# Altium PCB PCB_Control.V03.R00.PcbDoc (part 5 of 7)
Units mm, origin at the board's own origin, x right, y up, seen from the top; angles counter-clockwise.
Board outline 188 x 90 mm, 6 copper layers (Top Layer, GND 1, PWR, Signal L4, GND 2, Bottom Layer), stack 1.548 mm thick; 541 components, 265 nets, 1491 pads, 2159 vias.
Unrouted connection lines stored in the file: 819.
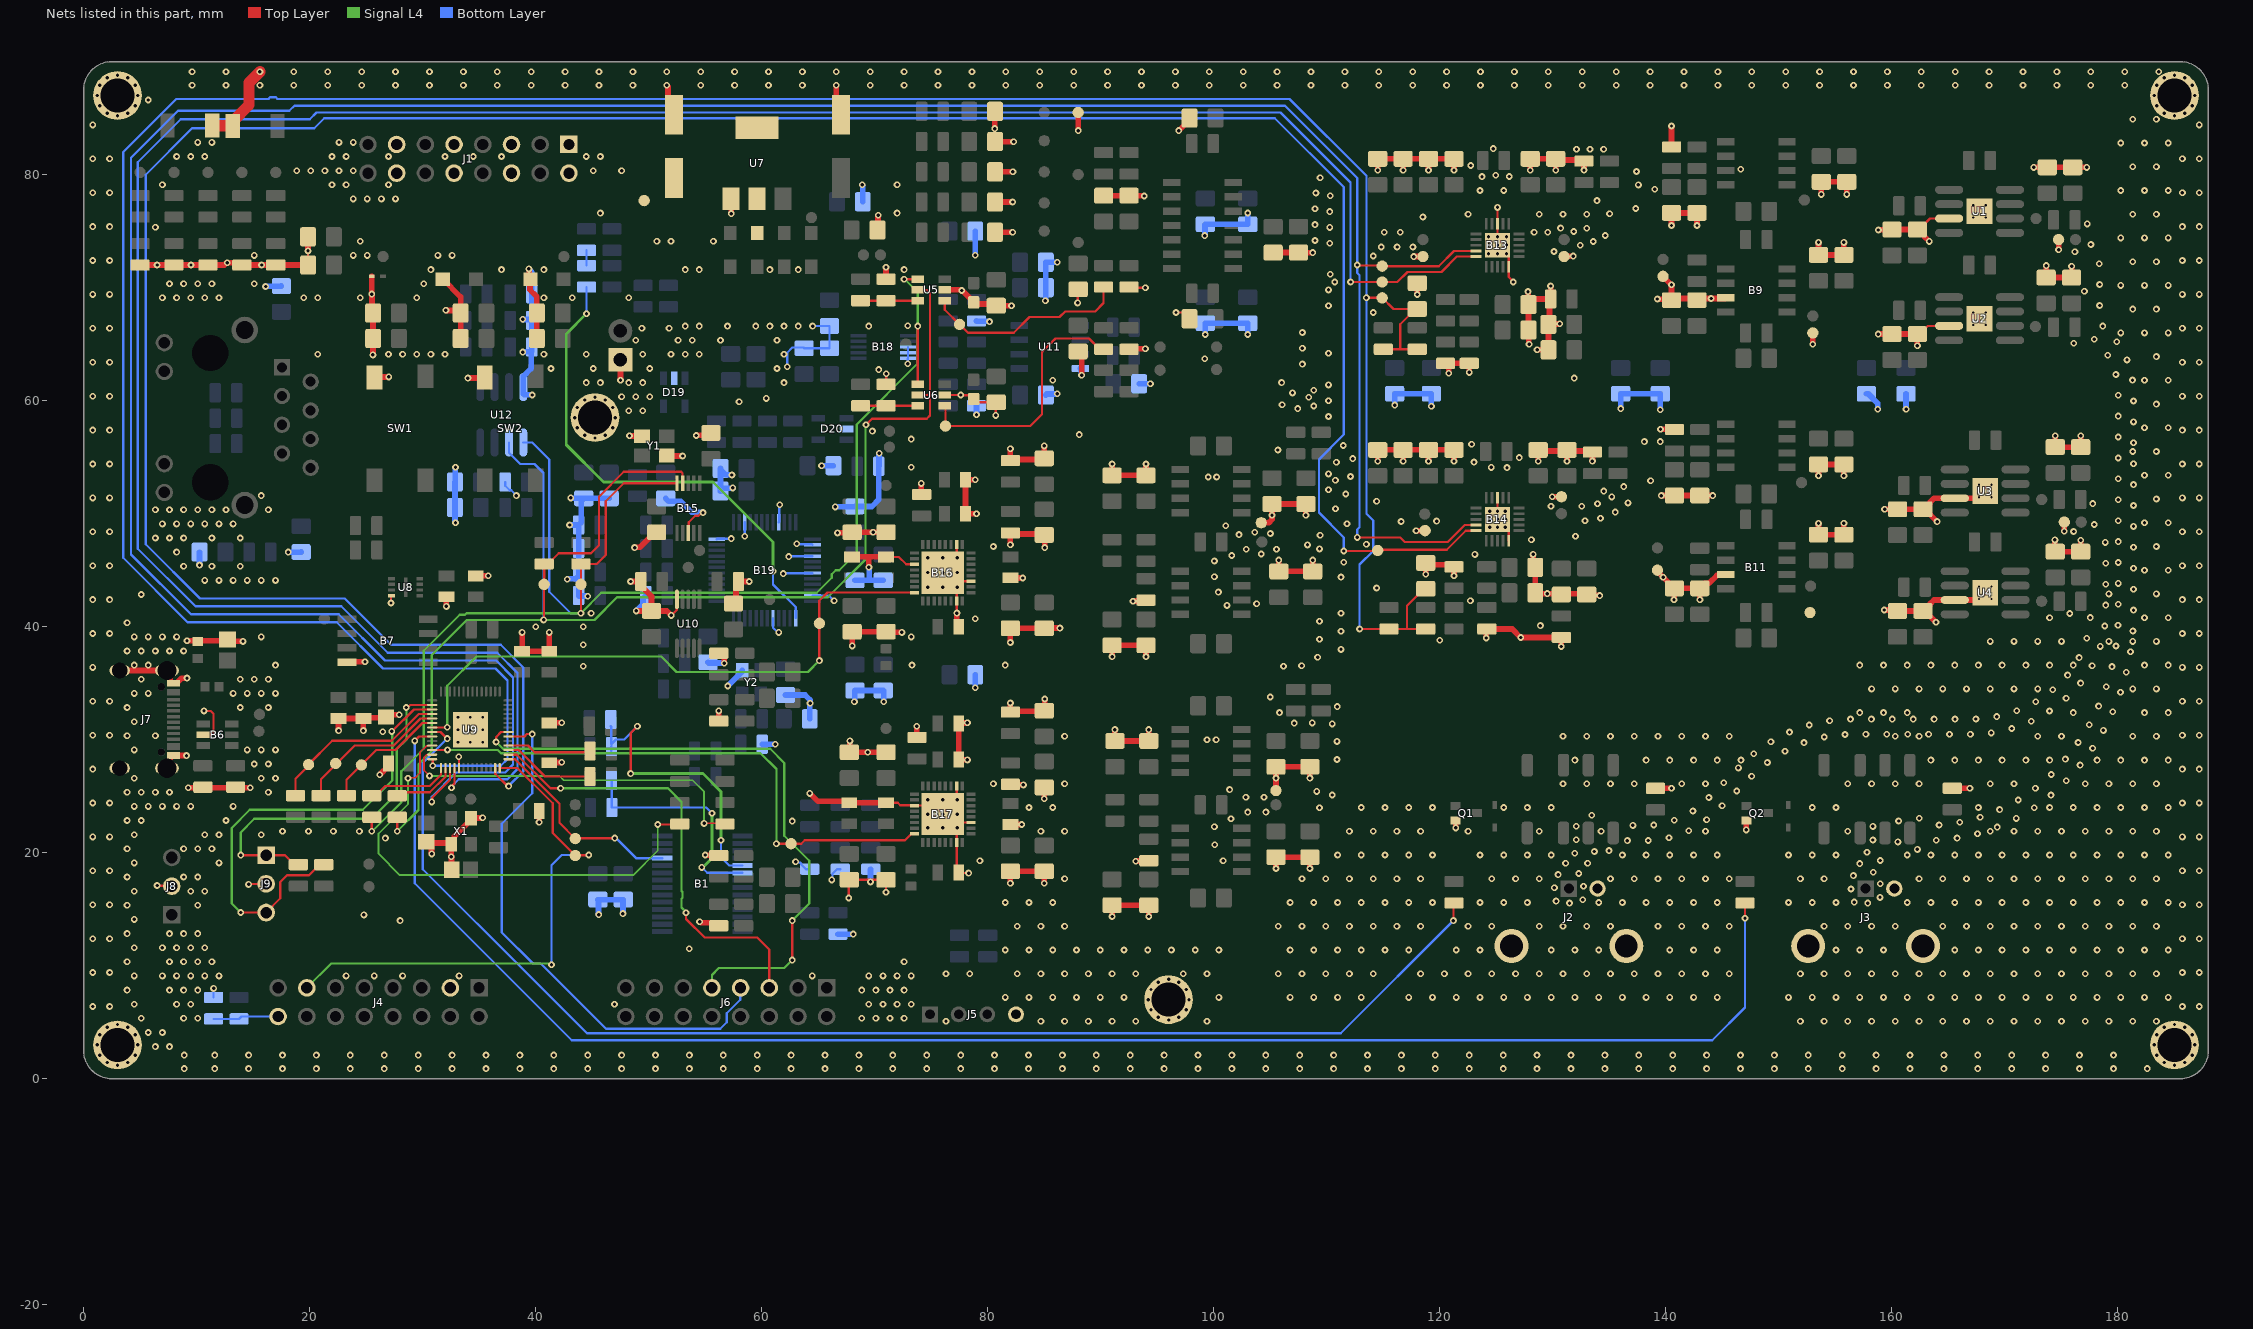
[diagram p8: the nets of this part, all layers, seen from the top]

## Via types
v1: diameter 0.6, hole 0.3, Top Layer to Bottom Layer, tented both sides, 1686 vias
v2: diameter 0.6, hole 0.3, Top Layer to Bottom Layer, 448 vias
v3: diameter 0.5, hole 0.2, Top Layer to Bottom Layer, tented both sides, 16 vias
v4: diameter 0.6, hole 0.25, Top Layer to Bottom Layer, tented both sides, 9 vias

## Nets (pads, with @x,y where several pads share a name; then routed paths per layer and width w, separated by ;. In a path a pad name is that pad's centre, name@x,y a point inside that pad or via, vN(x,y) a via of type N, cw(c..) or ccw(c..) an arc to the next point about the centre after c; other vN are vias at no path point) (continued)
GND: B6.2 B7.4 B9.3 B11.3 B13.10 B13.18 B13.21 B14.10 B14.18 B14.21 B15.8 B16.3 B16.15 B16.19 B16.26 B16.33 B17.3 B17.15 B17.19 B17.26 B17.33 B18.3 B18.4 B18.5 B19.3 B19.9 B19.14 B19.16 B19.19 B19.23 B19.29 B19.48 C1.2 C2.2 C3.2 C4.2 C5.2 C6.2 C7.2 C8.2 C9.2 C10.2 C11.2 C12.2 C13.2 C14.2 C15.2 C16.2 C17.2 C18.2 C19.2 C20.2 C21.2 C22.2 C23.2 C24.2 C25.2 C26.2 C27.2 C28.2 C29.2 C30.2 C31.2 C32.2 C33.2 C34.2 C35.2 C36.2 C37.2 C38.2 C39.2 C40.2 C41.2 C42.2 C43.2 C44.1 C45.1 C46.1 C47.1 C48.1 C49.1 C51.1 C52.1 C53.1 C54.1 C56.1 C57.1 C58.1 C59.1 C61.1 C62.1 C63.1 C64.1 C66.2 C67.K C68.2 C69.K C70.2 C71.2 C72.2 C73.2 C74.2 C75.2 C76.2 C77.2 C78.2 C79.2 C80.2 C81.2 C82.2 C83.1 C84.2 C85.1 C86.1 C87.1 C88.1 C89.1 C90.1 C93.2 C94.2 C95.2 C96.2 C97.1 C98.1 C99.1 C100.1 C103.2 C104.2 C105.2 C106.2 C107.2 C108.1 C109.1 C110.1 C111.1 C112.1 C113.1 C114.1 C115.1 C116.1 C117.1 C118.1 C119.1 C120.1 C121.1 C122.1 C123.1 C124.1 C125.1 C126.1 C127.1 C128.1 C129.1 C130.1 C131.1 C132.1 C133.1 C134.1 C135.1 C136.1 C137.1 C138.1 C139.2 C140.2 C141.2 C142.2 C143.2 C144.2 C145.2 C146.2 C147.1 C148.1 C149.1 C150.1 C151.1 C152.1 C153.2 C154.2 C155.2 C156.2 C157.2 C158.2 C159.2 C160.2 C161.1 C162.1 C163.1 C164.1 C165.1 C166.1 C171.1 C172.1 C173.1 C174.2 C175.1 C176.1 C177.1 C178.1 C179.1 C180.1 C181.1 C182.1 C183.2 C186.1 C187.1 C188.1 C189.1 C190.1 C191.1 C192.1 C193.1 C194.1 C195.1 C196.1 C197.1 C198.1 C199.1 C200.1 D1.2 D2.2 D3.1 D4.1 D5.K D6.K D7.K D8.A D9.A D10.2 D19.2 D20.2 J1.1 J1.2 J1.5 J1.6 J1.9 J1.10 J1.13 J1.14 J2.2 J2.3 J2.G1 J3.2 J3.3 J3.G1 J4.3 J5.4 J7.1 J7.2 J7.3 J7.4 J7.A1-B12 J7.B1-A12 J8.2 J9.2 JMP1.1 pad.1 Q1.2 Q2.2 R19.1 R21.1 R31.1 R32.1 R33.1 R37.1 R45.1 R54.1 R58.1 R60.1 R62.1 R63.1 R64.1 R73.1 R78.1 R84.1 R89.1 R92.1 R93.1 R96.1 R98.1 R101.1 R102.1 R105.1 R107.1 R108.2 R109.1 R110.1 R111.2 R112.1 R113.1 R118.2 R119.2 R120.1 R121.1 R122.1 R123.1 R127.1 R131.1 R136.2 R137.1 R138.1 R139.1 R141.1 R142.1 R143.1 R144.1 R145.1 R164.1 R166.1 SW1.2 SW2.2 TP13.1 TP16.1 TP20.1 TP47.1 TP49.1 TP59.1 TP63.1 TP64.1 TP68.1 TP73.1 TP76.1 TP77.1 TP80.1 U1.3 U1.9 U2.3 U2.9 U3.3 U3.9 U4.3 U4.9 U5.2 U6.2 U7.1 U8.4 U9.19 U9.57 U10.5 U11.4 U12.4 X1.2 X1.4 Y1.2 Y1.4 Y2.2 | length 690.2
  Top Layer w0.2: v1(6.5,17.1) 6.53,17.07 7.77,17.07 J8.2@7.8,17.04 ; J7.1@7.375,36.12 J7.1@7.58,36.12 ; J7.2@7.58,27.48 7.58,28.4 7.612,28.431 J7.B1-A12@7.781,28.431 ; B6.2@10.6,30.45 11.333,30.45 11.5,30.617 11.5,30.976 11.5,32.3 11.25,32.55 v1(10.65,32.55) ; C73.2@12.75,38.876 12.776,38.85 13.842,38.85 13.942,38.75 v1@14.05,38.75 ; R64.1@13.45,25.75 v1(14.75,25.75) ; v1(14.6,17.2) 14.625,17.225 16.125,17.225 J9.2@16.15,17.25 ; C7.2@19.857,72 v1(19.857,73.25) ; v1(27.2,42.1) 27.2,42.7 U8.4@27.25,42.75 ; v1(33.2,28.5) 33.217,28.483 U9.19@33.217,27.507 ; X1.4@34.318,23.167 34.7,23.1 v1(35.3,23.1) ; v1(52,41) 52.477,41.477 52.477,42.393 U10.5@52.5,42.416 ; B15.8@53.5,48.3 53.55,48.35 53.55,49.25 54.109,49.809 54.408,49.809 54.699,50.1 v1(54.807,50.1) ; v1(67.7,16) 67.7,17.557 C164.1@67.75,17.607 C163.1@71,17.607 v1(71,16.5) ; C153.2@71,24.425 72.034,24.425 72.259,24.2 73.475,24.2 B17.3@73.5,24.175 75.25,24.175 B17.33@76,23.425 77.25,24.675 B17.26@77.25,25.925 ; C139.2@71,46.175 72.125,46.175 72.779,45.521 B16.3@73.5,45.521 ; R62.1@71,61.45 71.024,61.474 v1(71.024,62.376) ; U6.2@76.2,60.5 v1(77.6,60.5) 77.613,60.487 78.352,60.487 78.75,60.089 78.75,59.857 C68.2@80.75,59.857 ; B17.33@76.75,22.675 B17.19@78.5,22.675 ; B17.33@77.25,22.175 B17.15@77.25,20.925 77.25,18.425 C158.2@77.425,18.25 77.475,18.2 v1(78.3,18.2) ; C143.2@77.25,40.175 C143.2@77.425,40 ; B16.33@77.25,46.021 B16.26@77.25,47.271 ; v1(77.269,41.204) 77.26,41.213 77.26,42.261 B16.15@77.25,42.271 77.25,43.521 B16.33@76.75,44.021 ; v1(77.3,43.5) 76.779,44.021 B16.33@76.75,44.021 ; v1(77.3,46.1) 77.3,46.071 v1(76,44.771) B16.33@76.75,44.021 ; B16.19@78.5,44.021 B16.33@76.75,44.021 ; v1(80.7,58.7) 80.7,59.807 C68.2@80.75,59.857 ; C66.2@80.75,68.407 C66.2@80.757,68.4 ; C68.2@80.793,59.9 C68.2@80.75,59.857 ; C141.2@82,44.325 C141.2@82.025,44.3 ; v1(87.95,68.65) 87.95,69.807 C108.1@88,69.857 ; C110.1@87.972,64.328 C110.1@88,64.357 ; R84.1@92.5,70.05 92.55,70 v1(93.95,70) ; v1(96.65,67.8) 97.307,67.8 C109.1@97.857,67.25 ; B14.18@125.1,51.4 v1(125.1,49.5) 126.1,48.5 B14.10@126.1,47.6 ; v1(125.1,73.75) 126.1,72.75 B13.10@126.1,71.85 126.1,70.949 126.5,70.549 v1(126.5,70.5) ; v1(125.1,74.5) B13.18@125.1,75.65 v1(125.1,77.1) ; C34.2@162.25,65.893 162.441,65.893 163.163,66.615 U2.3@165.06,66.615 ; C32.2@162.4,75.143 163.372,76.115 U1.3@165.06,76.115
  Top Layer w0.5: J7.3@3.195,36.12 J7.1@7.375,36.12 7.432,36.12 7.662,35.889 7.662,35.05 7.712,35 J7.A1-B12@7.95,35 ; D9.A@5,72 v1(6.5,72) D8.A@8,72 v1(9.5,72) D7.K@11,72 12.458,72 12.646,72.188 12.688,72.188 v1(12.707,72.207) ; J7.2@7.375,27.48 7.432,27.48 7.662,27.711 7.662,28.55 7.712,28.6 J7.B1-A12@7.95,28.6 7.981,28.569 8.012,28.6 v1(9.1,28.6) ; J7.A1-B12@8.225,35 8.67,35.445 9.145,35.445 v1(9.15,35.45) ; v1(9.15,38.75) 12.75,38.75 12.781,38.719 14.081,38.719 v1(14.1,38.7) ; v1(9.25,25.75) v1(14.75,25.75) ; v1@12.707,72.161 12.734,72.188 13.812,72.188 D6.K@14,72 v1(15.75,72) D5.K@17,72 ; D5.K@17.175,72 D5.K@17,72 ; D5.K@17.35,72 D5.K@17,72 ; C7.2@19.857,72 D5.K@17,72 ; v1(19.857,73.25) C6.2@19.857,74.5 ; v1(22.558,30.812) C75.2@22.558,31.887 22.57,31.875 24.746,31.875 C74.2@24.758,31.887 ; B7.4@23.3,36.86 23.34,36.9 v1(24.9,36.9) ; v1(24.758,30.812) C74.2@24.758,31.887 ; C74.2@25.3,31.887 C74.2@24.758,31.887 ; C74.2@25.3,31.937 26.683,31.937 26.946,32.2 27.9,32.2 v1(27.919,32.219) ; D1.2@25.5,71 v1(25.5,69.429) 25.519,69.409 25.519,67.838 C11.2@25.607,67.75 C12.2@25.607,65.5 ; v1(25.6,64.05) 25.604,64.053 25.604,65.496 C12.2@25.607,65.5 ; C12.2@25.6,65.493 C12.2@25.607,65.5 ; SW1.2@25.75,62.05 25.8,62.1 v1(27,62.1) ; v1(26.2,26.9) 26.975,27.675 C76.2@26.975,27.9 ; C85.1@30.3,20.975 C85.1@30.413,20.863 ; v1(30.8,19.9) 30.8,19.927 30.775,19.952 30.775,20.55 30.731,20.594 30.681,20.594 C85.1@30.413,20.863 ; D3.1@31.775,70.75 31.79,70.75 33.357,69.183 C22.2@33.357,67.75 ; v1(32.052,68) 32.071,67.981 33.126,67.981 C22.2@33.357,67.75 ; v1(32.1,41.8) C77.2@32.1,42.64 ; C86.1@32.575,18.5 32.544,18.531 32.544,19.644 32.55,19.65 32.525,19.675 X1.2@32.525,20.75 ; C23.2@33.357,65.5 C22.2@33.357,67.75 ; v1(34,62) 35.45,62 SW2.2@35.5,62.05 ; X1.4@34.275,22.925 32.8,21.45 32.8,21.025 X1.2@32.525,20.75 ; X1.4@34.275,23.05 34.306,23.081 35.281,23.081 v1(35.3,23.1) ; C78.2@34.7,44.49 34.705,44.495 35.795,44.495 v1(35.8,44.5) ; v1(38.8,39.5) C82.2@38.8,37.825 C81.2@41.2,37.825 v1(41.2,39.5) ; v1(39.4,71.66) 39.419,71.641 39.419,70.856 D2.2@39.525,70.75 39.5,70.725 39.5,69.8 40.1,69.2 40.1,67.757 C16.2@40.107,67.75 C17.2@40.107,65.5 ; v1(40.3,22.7) 40.313,22.713 40.313,23.687 C80.2@40.325,23.7 ; C79.2@41.2,27.975 41.213,27.987 42.288,27.987 v1(42.3,28) ; C84.2@41.2,31.475 41.213,31.487 42.288,31.487 v1(42.3,31.5) ; v1(47.5,61.8) JMP1.1@47.5,63.63 ; v1(48.3,56.9) 48.319,56.881 49.369,56.881 Y1.2@49.4,56.85 ; v1(48.4,44) R119.2@49.3,44 49.3,43.65 50.25,42.7 C172.1@50.25,41.393 ; v1(48.75,47) 48.769,47.019 49.212,47.019 50.55,48.357 C138.1@50.7,48.357 ; v1(48.9,41.4) 48.903,41.396 50.247,41.396 C172.1@50.25,41.393 ; Y1.4@51.6,55.15 51.65,55.1 v1(53,55.1) ; v1(51.6,87.9) 51.6,87.873 51.7,87.773 51.7,85.85 C71.2@52.25,85.3 ; v1(52,41) 51.607,41.393 C172.1@50.25,41.393 ; v1(54.2,56.92) 54.219,56.939 55.296,56.939 C137.1@55.5,57.143 ; v1(54.5,13.9) 54.527,13.9 54.627,13.8 55.95,13.8 R123.1@56.2,13.55 ; v1(55,19.8) 55.019,19.781 56.169,19.781 R122.1@56.2,19.75 ; R121.1@56.2,31.65 v1(56.2,32.55) ; R120.1@56.2,37.65 56.431,37.65 56.681,37.4 v1(56.681,36.769) ; v1(57.3,76.55) U7.1@57.3,77.85 ; C171.1@57.5,42.043 57.725,42.268 57.725,43.775 R118.2@57.95,44 v1(58.9,44) ; v1(64.25,25.25) 64.277,25.25 64.977,24.55 67.625,24.55 C154.2@67.75,24.425 C153.2@71,24.425 ; v1(66.6,87.9) 66.6,85.7 C70.2@67,85.3 ; v1(66.7,48.3) 66.719,48.319 67.962,48.319 C152.1@68,48.357 v1(69.85,48.357) C151.1@71,48.357 ; v1(67.8,29.893) 67.781,29.874 67.781,28.924 C166.1@67.75,28.893 v1(69.375,28.893) C165.1@71,28.893 C165.1@71.15,28.893 ; v1(68,38.3) C149.1@68,39.557 C150.1@71,39.557 71.038,39.519 72.381,39.519 v1(72.4,39.5) ; C140.2@68,46.175 69.425,46.175 ; v1(69.481,45.269) 69.481,46.119 69.425,46.175 ; v1(70.3,76.4) 70.281,76.381 70.281,75.138 C1.2@70.243,75.1 C1.2@70.324,75.181 ; C139.2@71,46.175 69.425,46.175 ; R60.1@71,70.75 v1(71,71.8) ; v1(73.71,31.19) 73.729,31.171 73.729,30.221 R111.2@73.75,30.2 ; v1(74.119,52.681) 74.119,51.731 R108.2@74.15,51.7 ; U5.2@76.2,69.8 v1@77.7,69.8 ; v1(77.269,41.204) 77.269,40.156 C143.2@77.425,40 ; v1(77.7,69.75) 77.719,69.731 77.769,69.731 78.75,68.75 C67.K@78.75,68.7 78.897,68.553 80.604,68.553 C66.2@80.75,68.407 80.754,68.403 82.097,68.403 v1(82.1,68.4) ; v1(78.2,28.219) 78.185,28.235 77.44,28.235 C157.2@77.425,28.25 C156.2@77.425,31.425 77.481,31.481 78.181,31.481 v1(78.2,31.5) ; v1(78.9,53) C144.2@78.025,53 C142.2@78.025,50 v1(79,50) ; v1(80.61,84.075) 80.626,84.092 80.626,85.583 C8.2@80.643,85.6 ; C18.2@80.643,74.9 v1(82.2,74.9) ; C24.2@80.643,77.575 v1(82.2,77.575) ; C13.2@80.643,80.25 v1(82.223,80.25) ; C3.2@80.643,82.925 80.656,82.912 v1(82.287,82.912) ; v1(82,17.3) C162.1@82,18.357 C161.1@85,18.357 v1(85,17.3) ; C155.2@82,22.5 v1(83,22.5) ; R112.1@82,26.05 82.031,26.019 83.131,26.019 v1(83.15,26) ; v1(82,33.25) R113.1@82,32.45 82.059,32.509 84.941,32.509 85.031,32.599 85.031,33.581 v1(85.05,33.6) ; v1(82,38.6) C148.1@82,39.857 C147.1@85,39.857 85.024,39.881 v1(86.381,39.881) ; C141.2@82,44.325 82.013,44.312 v1(83.087,44.312) ; v1(82,47.25) R109.1@82,48.3 82.097,48.203 84.904,48.203 85.031,48.076 85.031,47.019 v1(85.05,47) ; v1(82,55.75) R110.1@82,54.7 82.097,54.796 84.904,54.796 C146.2@85,54.893 v1(85,56) ; v1(85,24.782) C159.2@85,25.782 ; C110.1@88,64.357 88.3,64.057 v1(88.3,62.245) ; v1(88,83.9) TP13.1@88,85.5 ; C111.1@90.25,78.143 C112.1@92.5,78.143 92.517,78.126 93.824,78.126 v1(93.84,78.11) ; v1(91,14.357) C64.1@91,15.357 C63.1@94.25,15.357 v1(94.25,14.357) ; v1(91,37.357) C54.1@91,38.357 C53.1@94,38.357 v1(94,37.357) ; v1(91,54.393) C49.1@91,53.393 C48.1@94,53.393 v1(94,54.393) ; v1(91.25,30.893) C59.1@91.25,29.893 C58.1@94.25,29.893 v1(94.25,30.893) ; R89.1@92.5,64.55 92.531,64.581 93.931,64.581 v1(93.95,64.6) ; v1(92.85,42.25) 92.869,42.269 93.919,42.269 R54.1@94,42.35 ; v1(93.1,19.25) 93.119,19.269 94.219,19.269 R58.1@94.25,19.3 ; v1(96.9,83.9) 96.907,83.9 97.857,84.85 C107.2@97.857,85 ; TP47.1@104.2,49.2 104.857,49.2 105.15,49.493 C46.1@105.15,50.857 C47.1@108.15,50.857 v1(108.15,49.857) ; C113.1@105.25,73.107 C114.1@107.5,73.107 107.504,73.103 108.746,73.103 v1(108.75,73.1) ; v1(105.5,18.607) C61.1@105.5,19.607 C62.1@108.5,19.607 v1(108.5,18.607) ; TP49.1@105.5,25.5 v1(105.5,26.607) C56.1@105.5,27.607 C57.1@108.5,27.607 v1(108.5,26.607) ; v1(105.75,45.893) C51.1@105.75,44.893 C52.1@108.75,44.893 v1(108.75,45.893) ; v1(114.5,54.643) C134.1@114.5,55.643 C129.1@116.75,55.643 ; v1(114.5,80.393) C123.1@114.5,81.393 C118.1@116.75,81.393 ; v1(116.75,54.643) C129.1@116.75,55.643 ; v1(116.75,80.393) C118.1@116.75,81.393 ; v1(117.7,72.75) TP76.1@118.5,72.75 ; v1(117.9,48.5) TP80.1@118.7,48.5 ; v1(118,69.393) C117.1@118,70.393 ; v1(118.75,44.643) C128.1@118.75,45.643 118.922,45.471 121.079,45.471 R101.1@121.25,45.3 v1(121.25,44.5) ; v1(119,54.643) C130.1@119,55.643 ; v1(119,80.393) C119.1@119,81.393 ; v1(120.781,62.419) 120.781,63.05 120.531,63.3 R92.1@120.5,63.3 R93.1@122.6,63.3 v1(122.6,62.5) ; v1(121.25,54.643) C131.1@121.25,55.643 C130.1@119,55.643 ; v1(121.25,80.393) C120.1@121.25,81.393 C119.1@119,81.393 ; Q1.2@121.39,22.85 121.395,22.845 121.395,22.205 v1(121.4,22.2) ; v1(124.1,39) 124.119,39.019 124.119,39.769 R102.1@124.15,39.8 126.4,39.8 v1(127.15,39.05) R105.1@130.75,39.05 v1(130.75,38.25) ; v1(127.8,69.65) 127.819,69.631 127.819,68.524 C124.1@127.843,68.5 C124.1@127.843,68.55 ; v1(127.9,65) 127.881,65.019 127.881,66.212 C125.1@127.843,66.25 C124.1@127.843,68.55 ; v1(128,80.393) C121.1@128,81.393 C122.1@130.25,81.393 ; v1(128.25,46.4) 128.269,46.381 128.269,45.424 C135.1@128.443,45.25 C136.1@128.443,43 128.515,42.928 v1(129.5,42.928) 132.929,42.928 C127.1@133,42.857 133.088,42.769 134.131,42.769 v1(134.15,42.75) ; v1(128.607,64.5) C115.1@129.607,64.5 C116.1@129.607,66.75 ; v1(128.7,54.643) C132.1@128.7,55.643 128.797,55.546 133.404,55.546 R107.1@133.5,55.45 v1(133.5,54.65) ; v1(129.8,70.15) R96.1@129.8,69 ; v1(129.95,51.5) 130,51.5 TP77.1@130.75,51.5 ; v1(130.25,80.393) 130.25,81.296 132.654,81.296 R98.1@132.75,81.2 v1(132.75,80.4) ; v1(130.607,66.8) 130.588,66.781 129.638,66.781 C116.1@129.607,66.75 ; TP73.1@131,72.75 131.022,72.772 131.78,72.772 v1(131.799,72.791) ; v1(131.25,54.643) C133.1@131.25,55.643 ; R19.1@139.09,25.7 v1(140.5,25.7) ; TP64.1@139.25,45 139.25,44.908 139.753,44.405 v1(139.753,44.378) ; v1(139.25,69) 139.269,68.981 140.412,68.981 C96.2@140.5,68.893 ; v1(139.525,57.475) 139.538,57.462 140.713,57.462 R78.1@140.725,57.475 ; v1(139.6,51.6) 139.603,51.603 140.747,51.603 C103.2@140.75,51.607 C104.2@143,51.607 143.004,51.603 144.147,51.603 v1(144.15,51.6) ; TP59.1@139.75,71 v1(140.5,70.25) C96.2@140.5,68.893 ; v1@139.759,44.384 140.15,43.993 140.15,43.843 140.593,43.4 C106.2@140.743,43.4 ; v1(140.5,75.5) C94.2@140.5,76.607 C93.2@142.75,76.607 v1(142.75,75.5) ; R73.1@140.5,82.45 v1(140.5,84.3) ; v1(140.719,42.393) 140.735,42.408 140.735,43.378 C106.2@140.75,43.393 C105.2@143,43.393 ; v1(143.013,42.393) 143.006,42.399 143.006,43.387 C105.2@143,43.393 ; B11.3@145.288,44.615 145.213,44.54 144.515,44.54 143.818,43.843 143.45,43.843 C105.2@143,43.393 ; B9.3@145.288,69.115 145.213,69.04 v1(144,69.04) 140.647,69.04 C96.2@140.5,68.893 ; v1(147.119,22.019) 147.119,22.829 Q2.2@147.14,22.85 ; v1(153,65) TP63.1@153,66 ; v1(153.5,49.143) C99.1@153.5,48.143 C100.1@155.75,48.143 v1(155.75,49.15) ; v1(153.5,53.357) C98.1@153.5,54.357 C97.1@155.75,54.357 v1(155.75,53.35) ; v1(153.5,74) C89.1@153.5,72.893 C90.1@155.75,72.893 v1(155.75,74) ; v1(153.75,78.25) C88.1@153.75,79.357 C87.1@156,79.357 v1(156,78.25) ; v1(158.793,65.893) C35.2@160,65.893 C34.2@162.25,65.893 v1(162.25,64.85) ; v1(158.8,75.1) 158.819,75.119 159.938,75.119 159.957,75.1 C33.2@160,75.143 C32.2@162.25,75.143 162.4,75.143 162.85,74.693 162.85,74.543 v1@163.281,74.112 ; v1(159.319,41.481) 160.412,41.481 C43.2@160.5,41.393 C42.2@162.75,41.393 C42.2@162.9,41.393 ; v1(159.35,50.4) 159.354,50.396 160.497,50.396 C41.2@160.5,50.393 C40.2@162.75,50.393 C40.2@162.9,50.393 ; v1(163.9,40.4) 163.893,40.4 C42.2@162.9,41.393 ; v1(164,49.3) 163.993,49.3 C40.2@162.9,50.393 ; R21.1@165.34,25.7 v1(166.9,25.7) ; v3(167.7,42.45) 167.615,42.365 U4.3@165.56,42.365 163.728,42.365 163.35,41.987 163.35,41.843 C42.2@162.9,41.393 ; U3.9@168.25,52 167.615,51.365 U3.3@165.56,51.365 163.728,51.365 163.35,50.987 163.35,50.843 C40.2@162.9,50.393 ; v1(172.543,80.643) C28.2@173.75,80.643 C29.2@176,80.643 v1(177.243,80.643) ; v1(173.65,71.95) C30.2@173.65,70.893 C31.2@175.9,70.893 v1(175.9,71.9) ; v1(174.419,47.681) 174.419,46.674 C38.2@174.45,46.643 C39.2@176.7,46.643 v1(176.7,47.643) ; v1(174.45,56.893) C36.2@174.45,55.893 C37.2@176.7,55.893 v1(176.7,56.9) ; v1(174.75,73.35) TP16.1@174.75,74.25 ; v1(175.25,48.45) TP20.1@175.25,49.25 ; C85.1@30.413,20.863 32.413,20.863 X1.2@32.525,20.75 ; C129.1@116.75,55.643 C130.1@119,55.643 ; C118.1@116.75,81.393 C119.1@119,81.393 ; C124.1@127.843,68.55 128.293,69 R96.1@129.8,69 ; C116.1@129.607,66.75 129.704,66.846 129.704,68.903 R96.1@129.8,69
  Top Layer w1: D4.1@11.38,84.35 11.405,84.325 13.165,84.325 D10.2@13.19,84.3 ; D10.2@13.19,84.715 14.63,86.155 14.63,88.13 v1(15.6,89.1)
  Bottom Layer w0.2: R45.1@11.5,7.2 v1(11.5,8) ; R136.2@37.3,52.8 37.3,52.464 37.698,52.065 37.832,52.065 v1(38.294,51.604) ; B19.48@56.012,47.75 56.034,47.772 57.272,47.772 v1(57.293,47.793) ; v1(58.5,48) B19.3@58.5,49.238 ; B19.29@61,40.762 61,39.917 61.417,39.5 v1(61.5,39.5) ; B19.9@61.5,49.238 61.55,49.288 61.55,50.75 v1(61.6,50.8) ; v1(61.9,44.7) 61.925,44.725 64.463,44.725 B19.19@64.488,44.75 ; v1(62.25,63) 62.25,64.25 62.7,64.7 63.693,64.7 C179.1@63.75,64.643 C178.1@66,64.643 C174.2@66,66.607 65.993,66.6 v1(64.5,66.6) ; v1(62.4,46.2) 62.425,46.225 64.463,46.225 B19.16@64.488,46.25 ; v1(63,19.2) 63.066,19.134 63.383,19.134 63.515,19.002 63.515,18.948 63.914,18.55 R31.1@64.25,18.55 ; v1(63.1,47.35) 63.15,47.3 64.438,47.3 B19.14@64.488,47.25 ; B19.23@64.488,42.75 65.95,42.75 v1(66.4,42.3) ; v1(66.2,17.6) 66.262,17.662 66.262,18.152 66.661,18.55 R32.1@66.95,18.55 ; R33.1@69.6,18.5 R33.1@69.65,18.55 ; v1(72.926,63.274) 72.926,63.726 B18.5@72.95,63.75 B18.4@72.95,64.25 B18.3@72.95,64.75
  Bottom Layer w0.5: v1(10.25,45.45) 10.253,45.454 10.253,46.597 C186.1@10.257,46.6 ; v1(16.1,70.1) 16.119,70.119 17.476,70.119 C183.2@17.5,70.143 ; v1(18.1,46.6) 18.103,46.604 19.246,46.604 C187.1@19.25,46.607 ; v1(32.9,49.2) 32.9,49.227 32.857,49.27 C181.1@32.857,50.55 C180.1@32.857,52.8 32.881,52.824 32.881,54.081 v1(32.9,54.1) ; v1(38.85,64.3) 38.869,64.319 R137.1@39.4,64.319 ; v1(38.85,67.2) 38.869,67.181 39.569,67.181 R138.1@39.65,67.1 ; v1(39.4,71.66) 39.4,71.633 39.65,71.383 R138.1@39.65,67.1 ; v1(39.7,60.5) 39.681,60.519 38.997,60.519 38.905,60.612 U12.4@38.905,61.2 38.905,62.154 39.6,62.849 39.6,64.319 39.65,64.369 R138.1@39.65,67.1 ; v1(42.8,44.2) 42.827,44.2 42.86,44.233 43.55,44.233 R143.1@43.8,44.483 ; v1(43,49) R145.1@43.8,49 ; v1(43.1,51.4) 43.119,51.381 44.226,51.381 C198.1@44.25,51.357 ; v1(44.6,42.7) 44.581,42.719 43.831,42.719 R142.1@43.8,42.75 R143.1@43.8,44.483 ; v1(45.574,14.526) 45.555,14.545 45.555,15.802 C45.1@45.5,15.857 C44.1@47.75,15.857 47.719,15.826 v1(47.719,14.619) ; C189.1@46.5,51.357 C198.1@44.25,51.357 ; v1@48.919,41.419 49.5,42 49.5,42.5 R141.1@49.75,42.75 ; C196.1@51.5,51.357 51.766,51.091 52.848,51.091 53.25,50.689 53.82,50.119 54.788,50.119 v1(54.807,50.1) ; C182.1@55.25,36.857 55.319,36.788 56.662,36.788 v1(56.681,36.769) ; C193.1@56.357,53.893 56.807,53.443 57.338,53.443 v1(57.357,53.424) ; C193.1@56.357,54 C192.1@56.357,52 56.623,52.266 57.424,52.266 v1(57.443,52.286) ; v1(57,34.75) 57,34.775 58.275,36.05 Y2.2@58.275,36.15 ; R166.1@60.05,29.6 v1(61.2,29.6) ; C188.1@62.1,33.957 63.843,33.957 64.281,33.519 v1(64.281,33.219) 64.262,33.2 64.262,31.869 C197.1@64.243,31.85 ; v1(65.297,54.246) 65.299,54.248 66.341,54.248 C195.1@66.343,54.25 ; v1(66.5,50.6) 68.207,50.6 C194.1@68.25,50.643 69.743,50.643 70.35,51.25 R164.1@70.35,54.2 70.381,54.231 70.381,55.331 v1(70.4,55.35) ; R37.1@66.75,12.8 v1(68.1,12.8) ; v1(68.2,33.357) 68.219,33.376 68.219,34.326 C199.1@68.25,34.357 C200.1@70.75,34.357 70.781,34.326 70.781,33.376 v1(70.8,33.357) ; C190.1@68.25,44.107 69.5,44.107 ; v1(68.9,79.1) 68.9,79.073 68.943,79.03 C2.2@68.943,77.6 ; v1(69.481,45.269) 69.5,45.25 69.5,44.107 ; v1(69.619,17.419) 69.619,18.519 R33.1@69.65,18.55 ; C191.1@70.75,44.107 69.5,44.107 ; C10.2@78.893,35.75 78.897,35.747 78.897,34.603 v1(78.9,34.6) ; C9.2@78.893,75 78.897,74.997 78.897,72.876 v1(78.9,72.873) ; v1(79,58.75) R131.1@79,59.55 ; R127.1@79,67.05 79.031,67.019 80.131,67.019 v1(80.15,67) ; v1(85.1,68.85) 85.119,68.869 85.119,69.976 C177.1@85.143,70 C176.1@85.143,72.25 v1(86.143,72.25) ; C175.1@85.143,60.5 85.233,60.59 86.124,60.59 v1(86.143,60.609) ; U11.4@88.2,62.845 88.231,62.845 88.281,62.795 88.281,62.264 v1(88.3,62.245) ; C173.1@93.393,61.5 v1(94.393,61.5) ; v1(99.2,74.607) 99.219,74.626 99.219,75.576 C25.2@99.25,75.607 C19.2@103,75.607 v1(103,76.607) ; v1(99.25,65.857) C14.2@99.25,66.857 C4.2@103,66.857 v1(103,65.857) ; v1(116,59.607) C27.2@116,60.607 C21.2@119.25,60.607 v1(119.25,59.5) ; v1(136,59.3) C15.2@136,60.607 C5.2@139.5,60.607 v1(139.5,59.2) ; C20.2@157.75,60.607 157.9,60.607 158.731,59.776 158.731,59.269 v1(158.75,59.25) ; v1(161.25,59.25) C26.2@161.25,60.607 ; R143.1@43.8,44.483 R143.1@43.8,44.833 R144.1@43.8,46.917 R145.1@43.8,49 ; R145.1@43.8,49 44.025,49.225 44.025,51.132 C198.1@44.25,51.357
  other v1: 8.9,0.9 11.6,0.9 14.6,0.9 17.6,0.9 20.6,0.9 23.6,0.9 26.6,0.9 29.6,0.9 32.6,0.9 35.6,0.9 38.6,0.9 41.6,0.9 44.6,0.9 47.6,0.9 50.6,0.9 53.6,0.9 56.6,0.9 59.6,0.9 62.6,0.9 65.6,0.9 68.6,0.9 71.6,0.9 74.6,0.9 77.6,0.9 80.6,0.9 83.6,0.9 86.6,0.9 89.6,0.9 92.6,0.9 95.6,0.9 98.6,0.9 101.6,0.9 104.6,0.9 107.6,0.9 110.6,0.9 113.6,0.9 116.6,0.9 119.6,0.9 122.6,0.9 125.6,0.9 128.6,0.9 131.6,0.9 134.6,0.9 137.6,0.9 140.6,0.9 143.6,0.9 146.6,0.9 149.6,0.9 152.6,0.9 155.6,0.9 158.6,0.9 161.6,0.9 164.6,0.9 167.6,0.9 170.6,0.9 173.6,0.9 176.6,0.9 179.6,0.9 182.6,0.9 3,1.2 185,1.2 2.1,1.441 3.9,1.441 184.1,1.441 185.9,1.441 1.441,2.1 4.559,2.1 8.9,2.1 11.6,2.1 14.6,2.1 17.6,2.1 20.6,2.1 23.6,2.1 26.6,2.1 29.6,2.1 32.6,2.1 35.6,2.1 38.6,2.1 41.6,2.1 44.6,2.1 47.6,2.1 50.6,2.1 53.6,2.1 56.6,2.1 59.6,2.1 62.6,2.1 65.6,2.1 68.6,2.1 71.6,2.1 74.6,2.1 77.6,2.1 80.6,2.1 83.6,2.1 86.6,2.1 89.6,2.1 92.6,2.1 95.6,2.1 98.6,2.1 101.6,2.1 104.6,2.1 107.6,2.1 110.6,2.1 113.6,2.1 116.6,2.1 119.6,2.1 122.6,2.1 125.6,2.1 128.6,2.1 131.6,2.1 134.6,2.1 137.6,2.1 140.6,2.1 143.6,2.1 146.6,2.1 149.6,2.1 152.6,2.1 155.6,2.1 158.6,2.1 161.6,2.1 164.6,2.1 167.6,2.1 170.6,2.1 173.6,2.1 176.6,2.1 179.6,2.1 183.441,2.1 186.559,2.1 6.35,2.85 7.6,2.85 1.2,3 4.8,3 183.2,3 186.8,3 1.441,3.9 4.559,3.9 183.441,3.9 186.559,3.9 5.725,4.1 6.975,4.1 2.1,4.559 3.9,4.559 184.1,4.559 185.9,4.559 3,4.8 185,4.8 96,5.2 5.1,5.35 8.85,5.35 10.1,5.35 68.85,5.35 70.1,5.35 71.35,5.35 72.6,5.35 95.1,5.441 96.9,5.441 94.441,6.1 97.559,6.1 0.8,6.4 2.3,6.4 185.7,6.4 187.2,6.4 4.475,6.6 8.225,6.6 9.475,6.6 46.975,6.6 69.475,6.6 70.725,6.6 71.975,6.6 73.225,6.6 94.2,7 97.8,7 3.85,7.85 7.6,7.85 8.85,7.85 10.1,7.85 68.85,7.85 70.1,7.85 71.35,7.85 72.6,7.85 94.441,7.9 97.559,7.9 95.1,8.559 96.9,8.559 96,8.8 4.475,9.1 6.975,9.1 8.225,9.1 9.475,9.1 10.725,9.1 11.975,9.1 23.225,9.1 25.725,9.1 28.225,9.1 33.225,9.1 64.475,9.1 69.475,9.1 70.725,9.1 71.975,9.1 73.225,9.1 0.8,9.4 2.3,9.4 185.7,9.4 187.2,9.4 3.85,10.35 7.6,10.35 8.85,10.35 10.1,10.35 11.35,10.35 72.6,10.35 53.593,11.5 4.475,11.6 6.975,11.6 8.225,11.6 9.475,11.6 10.725,11.6 0.8,12.4 2.3,12.4 185.7,12.4 187.2,12.4 3.85,12.85 7.6,12.85 8.85,12.85 10.1,12.85 28,14 4.475,14.1 24.8,14.5 3.85,15.35 10.1,15.35 0.8,15.4 2.3,15.4 185.7,15.4 187.2,15.4 131.475,15.542 157.86,15.542 156.663,15.631 130.289,15.721 132.636,15.847 158.947,16.051 4.475,16.6 9.475,16.6 10.725,16.6 156.382,16.797 130.132,16.911 132.708,17.045 158.958,17.251 3.85,17.85 8.85,17.85 10.1,17.85 156.588,17.979 130.464,18.064 132.283,18.167 158.348,18.284 0.8,18.4 2.3,18.4 185.7,18.4 187.2,18.4 157.143,19.043 131.129,19.063 133.071,19.073 4.475,19.1 11.975,19.1 100.822,19.284 79.3,19.3 158.965,19.313 32.525,19.65 131.93,19.956 157.797,20.049 133.674,20.11 134.967,20.194 162.257,20.299 3.85,20.35 8.85,20.35 10.1,20.35 11.35,20.35 100.074,20.699 160.528,20.957 136.592,21.077 138.442,21.088 163.922,21.105 158.319,21.13 132.069,21.148 165.762,21.297 26.7,21.3 140.275,21.335 0.8,21.4 2.3,21.4 185.7,21.4 187.2,21.4 4.475,21.6 10.725,21.6 11.975,21.6 15.725,21.6 167.57,21.688 17.6,21.9 19.9,21.9 22.1,21.9 24.4,21.9 134.269,21.907 142.02,21.952 74.7,22.2 76,22.2 77.3,22.2 169.326,22.272 100.049,22.299 158.319,22.33 132.069,22.348 137.082,22.423 138.932,22.457 164.172,22.459 166.006,22.705 62.7,22.8 160.59,22.806 3.85,22.85 5.1,22.85 12.6,22.85 140.735,22.871 143.6,22.913 101.525,23 171.008,23.042 162.423,23.06 167.802,23.15 133.444,23.309 74.7,23.4 76,23.4 77.3,23.4 103.009,23.599 104.609,23.599 142.393,23.692 169.528,23.816 109.35,23.975 172.597,23.991 4.475,24.1 5.725,24.1 6.975,24.1 8.225,24.1 9.475,24.1 13.225,24.1 144.971,24.156 0.8,24.4 2.3,24.4 185.7,24.4 187.2,24.4 171.17,24.668 74.7,24.7 76,24.7 77.3,24.7 102.843,24.901 104.443,24.901 143.802,24.89 174.075,25.102 110.474,25.114 3.85,25.35 5.1,25.35 6.35,25.35 7.6,25.35 16.35,25.35 109.103,25.427 146.279,25.464 101.397,25.586 172.694,25.717 145.11,26.199 175.423,26.37 4.475,26.6 15.725,26.6 16.975,26.6 147.587,26.772 174.093,26.928 0.8,27.4 185.7,27.4 187.2,27.4 146.418,27.507 176.646,27.758 15.1,27.85 16.35,27.85 148.981,27.988 110.901,28.255 175.345,28.289 147.78,28.759 150.538,28.987 4.475,29.1 14.475,29.1 15.725,29.1 16.975,29.1 177.752,29.241 152.223,29.75 176.471,29.757 149.294,29.823 110.901,29.855 99.4,30 100.2,30 154.008,30.238 3.85,30.35 6.35,30.35 0.8,30.4 2.3,30.4 185.7,30.4 187.2,30.4 155.844,30.459 157.694,30.477 159.544,30.477 161.394,30.477 163.244,30.477 165.094,30.477 166.944,30.477 168.79,30.604 150.936,30.674 26.461,30.698 178.712,30.822 170.599,30.992 152.677,31.301 177.457,31.322 110.474,31.397 107.111,31.475 108.711,31.488 4.475,31.6 172.333,31.636 154.488,31.679 156.332,31.824 158.182,31.823 160.032,31.823 161.882,31.823 163.732,31.823 165.582,31.823 167.432,31.833 169.27,32.045 105.808,32.404 179.535,32.479 173.945,32.544 171.048,32.557 3.85,32.85 13.85,32.85 16.35,32.85 110.924,32.933 178.286,32.976 172.717,33.354 0.8,33.4 2.3,33.4 185.7,33.4 187.2,33.4 175.411,33.673 104.988,33.777 4.475,34.1 5.725,34.1 13.225,34.1 14.475,34.1 15.725,34.1 16.975,34.1 180.22,34.198 174.231,34.416 178.972,34.694 176.69,35.01 5.1,35.35 13.85,35.35 15.1,35.35 16.35,35.35 175.543,35.721 180.738,35.974 0.8,36.4 185.7,36.4 187.2,36.4 179.476,36.474 44.2,36.5 106.169,36.5 107.769,36.551 177.708,36.554 4.475,36.6 5.725,36.6 16.975,36.6 73.3,36.6 176.564,37.264 109.185,37.295 181.105,37.787 3.85,37.85 5.1,37.85 6.35,37.85 7.6,37.85 8.85,37.85 111.251,37.992 178.428,38.258 179.827,38.291 44.2,38.4 120,38.8 109.349,38.887 177.243,38.985 4.475,39.1 5.725,39.1 6.975,39.1 8.225,39.1 15.725,39.1 73.225,39.1 0.8,39.4 2.3,39.4 185.7,39.4 187.2,39.4 111.251,39.592 181.322,39.624 40,40 44.2,40 178.828,40.065 128.9,40.1 180.001,40.132 3.85,40.35 109.349,40.487 78.9,40.7 177.552,40.809 175.738,41.168 44.9,41.2 111.251,41.192 181.373,41.473 101.166,41.884 178.911,41.913 180.027,41.982 103.788,42.034 122.7,42.3 0.8,42.4 2.3,42.4 185.7,42.4 187.2,42.4 5.1,42.85 100.407,43.061 181.373,43.323 114.4,43.428 74.7,43.5 76,43.5 178.911,43.763 180.027,43.832 10.725,44.1 11.975,44.1 13.225,44.1 14.475,44.1 15.725,44.1 16.975,44.1 111.251,44.392 100.049,44.414 74.7,44.8 77.3,44.8 181.373,45.173 8.85,45.35 11.35,45.35 13.85,45.35 0.8,45.4 2.3,45.4 185.7,45.4 187.2,45.4 178.911,45.613 180.027,45.682 111.5,45.7 100.049,45.814 74.7,46.1 76,46.1 101.582,46.297 123.1,46.4 104.207,46.436 8.225,46.6 102.869,46.849 105.545,46.849 109.349,46.887 181.373,47.023 108.294,47.239 113.5,47.3 178.866,47.462 180.027,47.532 128.1,47.7 6.35,47.85 7.6,47.85 8.85,47.85 11.35,47.85 13.85,47.85 132,48 109.405,48.091 102.228,48.151 105.009,48.246 103.613,48.355 0.8,48.4 2.3,48.4 185.7,48.4 187.2,48.4 176.073,48.422 124.4,48.8 125.1,48.8 125.8,48.8 181.373,48.873 101.061,48.925 177.907,49.045 6.975,49.1 8.225,49.1 9.475,49.1 10.725,49.1 11.975,49.1 13.225,49.1 111.783,49.101 116.569,49.311 119.711,49.349 132.838,49.368 180.027,49.382 124.4,49.5 125.8,49.5 134.218,49.606 105.15,49.857 135.511,50.143 124.4,50.2 125.1,50.2 125.8,50.2 6.35,50.35 7.6,50.35 8.85,50.35 10.1,50.35 11.35,50.35 12.6,50.35 16.35,50.35 110.767,50.428 129.834,50.651 132.564,50.656 181.373,50.723 133.944,50.888 177.775,50.89 136.651,50.956 114.4,51.1 180.027,51.232 0.8,51.4 2.3,51.4 185.7,51.4 187.2,51.4 135.209,51.489 15.725,51.6 111.682,51.74 134.5,52 110.151,52.123 136.275,52.396 181.373,52.573 138.644,52.922 110.755,52.954 180.027,53.082 99.5,53.25 100.25,53.25 112.09,53.288 110.151,53.523 125.943,54.075 73.225,54.1 124.549,54.1 0.8,54.4 2.3,54.4 185.7,54.4 187.2,54.4 181.373,54.423 110.848,54.551 123.017,54.562 112.3,54.874 180.027,54.932 127.025,54.962 105.672,55.638 111.445,56.035 122.808,56.148 181.373,56.273 138.102,56.379 139.502,56.379 73.225,56.6 45.25,56.7 180.027,56.782 44.35,56.941 46.15,56.941 88.1,57 69.79,57.31 0.8,57.4 2.3,57.4 185.7,57.4 187.2,57.4 43.691,57.6 46.809,57.6 181.373,58.123 43.45,58.5 47.05,58.5 110.151,58.599 180.027,58.632 48.225,59.1 49.475,59.1 107.431,59.298 43.691,59.4 46.809,59.4 108.849,59.529 106.041,59.633 58,59.9 181.373,59.973 110.151,59.999 44.35,60.059 46.15,60.059 60.4,60.2 45.25,60.3 108.401,60.307 47.6,60.35 48.85,60.35 50.1,60.35 0.8,60.4 2.3,60.4 185.7,60.4 187.2,60.4 180.027,60.482 106.964,60.685 108.849,60.929 110.151,61.399 44.475,61.6 45.725,61.6 48.225,61.6 49.475,61.6 61.975,61.6 106,61.6 181.285,61.821 131.9,62 179.815,62.32 70.349,62.751 41.35,62.85 45.1,62.85 50.1,62.85 61.35,62.85 107.835,63.233 0.8,63.4 2.3,63.4 185.7,63.4 187.2,63.4 180.795,63.605 99.2,63.7 179.09,64.022 20.725,64.1 26.975,64.1 28.225,64.1 29.475,64.1 30.725,64.1 31.975,64.1 40.725,64.1 44.475,64.1 49.475,64.1 51.975,64.1 53.225,64.1 54.475,64.1 61.975,64.1 110.151,64.199 107.835,64.633 176.092,65.075 179.893,65.22 48.85,65.35 52.6,65.35 53.85,65.35 56.35,65.35 61.35,65.35 177.905,65.443 107.835,66.033 0.8,66.4 2.3,66.4 49.4,66.4 51.8,66.4 185.7,66.4 187.2,66.4 53.225,66.6 54.475,66.6 56.975,66.6 59.475,66.6 60.725,66.6 61.975,66.6 63.225,66.6 69.475,66.6 178.656,66.596 72.924,66.624 114.1,67.8 110.151,68.399 178.373,68.424 6.975,69.1 8.225,69.1 9.475,69.1 10.725,69.1 11.975,69.1 19.475,69.1 20.725,69.1 24.475,69.1 29.475,69.1 40.725,69.1 43.225,69.1 48.225,69.1 0.8,69.4 2.3,69.4 185.7,69.4 187.2,69.4 177.027,69.688 110.151,69.799 178.373,70.274 7.6,70.35 8.85,70.35 10.1,70.35 11.35,70.35 15.1,70.35 30.1,70.35 110.7,70.5 110.307,71.19 30.725,71.6 36.975,71.6 40.725,71.6 53.225,71.6 54.475,71.6 60.725,71.6 63.225,71.6 72.6,71.6 178.345,72.124 0.8,72.4 2.3,72.4 185.7,72.4 187.2,72.4 114.1,72.8 15.1,72.85 23.85,72.85 25.1,72.85 31.35,72.85 32.6,72.85 124.3,73 125.1,73 125.9,73 176.186,73.186 130.1,73.2 114.818,73.599 116.218,73.599 117.618,73.599 132.416,73.745 124.3,73.8 125.9,73.8 177.605,73.82 110.251,73.933 24.475,74.1 50.725,74.1 51.975,74.1 55.725,74.1 133.566,74.088 163.3,74.093 108.949,74.175 124.3,74.5 125.9,74.5 134.644,74.615 115.089,74.901 116.489,74.901 128.339,74.901 129.539,74.901 131.843,74.968 130.681,75.269 133.005,75.265 110.251,75.333 6.35,75.35 0.8,75.4 2.3,75.4 185.7,75.4 187.2,75.4 108.949,75.575 177.275,75.64 118.5,76.25 135.021,76.543 45.725,76.6 71.975,76.6 110.251,76.733 108.949,76.975 137.326,77.004 133.9,77.7 23.85,77.85 25.1,77.85 26.35,77.85 27.6,77.85 110.311,78.132 109.031,78.373 0.8,78.4 2.3,78.4 185.7,78.4 187.2,78.4 139.023,78.701 6.975,79.1 21.975,79.1 23.225,79.1 26.975,79.1 71.975,79.1 137.567,79.088 109.401,79.723 123.726,79.825 126.14,79.838 124.946,79.953 137.401,80.277 18.85,80.35 20.1,80.35 21.35,80.35 22.6,80.35 23.85,80.35 45.1,80.35 47.6,80.35 146.615,80.467 122.725,80.803 0.8,81.4 2.3,81.4 185.7,81.4 187.2,81.4 8.225,81.6 9.475,81.6 10.725,81.6 21.975,81.6 23.225,81.6 26.975,81.6 31.975,81.6 34.475,81.6 36.975,81.6 44.475,81.6 45.725,81.6 132.087,82.249 133.287,82.249 134.487,82.249 124.72,82.3 10.1,82.85 11.35,82.85 22.6,82.85 23.85,82.85 0.8,84.4 187.2,84.4 3,85.2 185,85.2 2.1,85.441 3.9,85.441 184.1,85.441 185.9,85.441 1.441,86.1 4.559,86.1 183.441,86.1 186.559,86.1 5.725,86.6 1.2,87 4.8,87 183.2,87 186.8,87 1.441,87.9 4.559,87.9 9.6,87.9 12.6,87.9 15.6,87.9 18.6,87.9 21.6,87.9 24.6,87.9 27.6,87.9 30.6,87.9 33.6,87.9 36.6,87.9 39.6,87.9 42.6,87.9 45.6,87.9 48.6,87.9 54.6,87.9 57.6,87.9 60.6,87.9 63.6,87.9 69.6,87.9 72.6,87.9 75.6,87.9 78.6,87.9 81.6,87.9 84.6,87.9 87.6,87.9 90.6,87.9 93.6,87.9 96.6,87.9 99.6,87.9 102.6,87.9 105.6,87.9 108.6,87.9 111.6,87.9 114.6,87.9 117.6,87.9 120.6,87.9 123.6,87.9 126.6,87.9 129.6,87.9 132.6,87.9 135.6,87.9 138.6,87.9 141.6,87.9 144.6,87.9 147.6,87.9 150.6,87.9 153.6,87.9 156.6,87.9 159.6,87.9 162.6,87.9 165.6,87.9 168.6,87.9 171.6,87.9 174.6,87.9 177.6,87.9 180.6,87.9 183.441,87.9 186.559,87.9 2.1,88.559 3.9,88.559 184.1,88.559 185.9,88.559 3,88.8 185,88.8 9.6,89.1 12.6,89.1 18.6,89.1 21.6,89.1 24.6,89.1 27.6,89.1 30.6,89.1 33.6,89.1 36.6,89.1 39.6,89.1 42.6,89.1 45.6,89.1 48.6,89.1 51.6,89.1 54.6,89.1 57.6,89.1 60.6,89.1 63.6,89.1 66.6,89.1 69.6,89.1 72.6,89.1 75.6,89.1 78.6,89.1 81.6,89.1 84.6,89.1 87.6,89.1 90.6,89.1 93.6,89.1 96.6,89.1 99.6,89.1 102.6,89.1 105.6,89.1 108.6,89.1 111.6,89.1 114.6,89.1 117.6,89.1 120.6,89.1 123.6,89.1 126.6,89.1 129.6,89.1 132.6,89.1 135.6,89.1 138.6,89.1 141.6,89.1 144.6,89.1 147.6,89.1 150.6,89.1 153.6,89.1 156.6,89.1 159.6,89.1 162.6,89.1 165.6,89.1 168.6,89.1 171.6,89.1 174.6,89.1 177.6,89.1 180.6,89.1 183.6,89.1
  other v2: 76.3,5.1 84.7,5.1 86.8,5.1 88.9,5.1 91,5.1 93.1,5.1 99.4,5.1 151.9,5.1 154,5.1 156.1,5.1 158.2,5.1 160.3,5.1 162.4,5.1 164.5,5.1 166.6,5.1 168.7,5.1 170.8,5.1 172.9,5.1 175,5.1 177.1,5.1 179.2,5.1 181.3,5.1 183.4,5.1 81.55,7.2 83.65,7.2 85.75,7.2 87.85,7.2 89.95,7.2 92.05,7.2 100.45,7.2 106.75,7.2 108.85,7.2 110.95,7.2 113.05,7.2 117.25,7.2 119.35,7.2 121.45,7.2 123.55,7.2 125.65,7.2 127.75,7.2 129.85,7.2 131.95,7.2 134.05,7.2 136.15,7.2 138.25,7.2 140.35,7.2 142.45,7.2 144.55,7.2 150.85,7.2 152.95,7.2 155.05,7.2 157.15,7.2 159.25,7.2 161.35,7.2 163.45,7.2 165.55,7.2 167.65,7.2 169.75,7.2 171.85,7.2 173.95,7.2 176.05,7.2 178.15,7.2 180.25,7.2 182.35,7.2 184.45,7.2 76.3,9.3 78.4,9.3 82.6,9.3 84.7,9.3 86.8,9.3 88.9,9.3 91,9.3 93.1,9.3 97.3,9.3 99.4,9.3 105.7,9.3 107.8,9.3 109.9,9.3 112,9.3 114.1,9.3 118.3,9.3 120.4,9.3 122.5,9.3 124.6,9.3 126.7,9.3 128.8,9.3 130.9,9.3 133,9.3 135.1,9.3 137.2,9.3 139.3,9.3 141.4,9.3 143.5,9.3 145.6,9.3 151.9,9.3 154,9.3 156.1,9.3 158.2,9.3 160.3,9.3 162.4,9.3 164.5,9.3 166.6,9.3 168.7,9.3 170.8,9.3 172.9,9.3 175,9.3 177.1,9.3 179.2,9.3 181.3,9.3 183.4,9.3 81.55,11.4 83.65,11.4 85.75,11.4 87.85,11.4 89.95,11.4 92.05,11.4 94.15,11.4 96.25,11.4 98.35,11.4 100.45,11.4 106.75,11.4 108.85,11.4 110.95,11.4 113.05,11.4 115.15,11.4 117.25,11.4 121.45,11.4 123.55,11.4 129.85,11.4 131.95,11.4 134.05,11.4 140.35,11.4 142.45,11.4 144.55,11.4 155.05,11.4 157.15,11.4 159.25,11.4 165.55,11.4 167.65,11.4 169.75,11.4 171.85,11.4 173.95,11.4 176.05,11.4 178.15,11.4 180.25,11.4 182.35,11.4 184.45,11.4 82.6,13.5 84.7,13.5 86.8,13.5 105.7,13.5 107.8,13.5 109.9,13.5 112,13.5 114.1,13.5 116.2,13.5 118.3,13.5 122.5,13.5 124.6,13.5 128.8,13.5 130.9,13.5 133,13.5 135.1,13.5 139.3,13.5 141.4,13.5 143.5,13.5 145.6,13.5 154,13.5 156.1,13.5 158.2,13.5 160.3,13.5 164.5,13.5 166.6,13.5 168.7,13.5 170.8,13.5 172.9,13.5 175,13.5 177.1,13.5 179.2,13.5 181.3,13.5 183.4,13.5 81.55,15.6 83.65,15.6 85.75,15.6 106.75,15.6 108.85,15.6 110.95,15.6 113.05,15.6 115.15,15.6 117.25,15.6 119.35,15.6 123.55,15.6 125.65,15.6 127.75,15.6 134.05,15.6 136.15,15.6 138.25,15.6 140.35,15.6 142.45,15.6 144.55,15.6 150.85,15.6 152.95,15.6 155.05,15.6 161.35,15.6 163.45,15.6 165.55,15.6 167.65,15.6 169.75,15.6 171.85,15.6 173.95,15.6 176.05,15.6 178.15,15.6 180.25,15.6 182.35,15.6 184.45,15.6 86.8,17.7 107.8,17.7 109.9,17.7 112,17.7 114.1,17.7 116.2,17.7 118.3,17.7 124.6,17.7 126.7,17.7 128.8,17.7 135.1,17.7 137.2,17.7 139.3,17.7 141.4,17.7 143.5,17.7 145.6,17.7 151.9,17.7 154,17.7 162.4,17.7 164.5,17.7 166.6,17.7 168.7,17.7 170.8,17.7 172.9,17.7 175,17.7 177.1,17.7 179.2,17.7 181.3,17.7 183.4,17.7 110.95,19.8 113.05,19.8 115.15,19.8 117.25,19.8 119.35,19.8 123.55,19.8 125.65,19.8 127.75,19.8 129.85,19.8 136.15,19.8 138.25,19.8 140.35,19.8 142.45,19.8 144.55,19.8 150.85,19.8 152.95,19.8 155.05,19.8 161.35,19.8 163.45,19.8 165.55,19.8 167.65,19.8 169.75,19.8 171.85,19.8 173.95,19.8 176.05,19.8 178.15,19.8 180.25,19.8 182.35,19.8 184.45,19.8 84.7,21.9 86.8,21.9 112,21.9 114.1,21.9 116.2,21.9 118.3,21.9 122.5,21.9 128.8,21.9 143.5,21.9 156.1,21.9 168.7,21.9 170.8,21.9 172.9,21.9 175,21.9 177.1,21.9 179.2,21.9 181.3,21.9 183.4,21.9 83.65,24 85.75,24 113.05,24 115.15,24 117.25,24 119.35,24 125.65,24 127.75,24 129.85,24 152.95,24 155.05,24 167.65,24 173.95,24 176.05,24 178.15,24 180.25,24 182.35,24 184.45,24 80.5,26.1 86.8,26.1 130.9,26.1 133,26.1 135.1,26.1 137.2,26.1 141.4,26.1 143.5,26.1 156.1,26.1 158.2,26.1 160.3,26.1 162.4,26.1 168.7,26.1 170.8,26.1 177.1,26.1 179.2,26.1 181.3,26.1 183.4,26.1 131.95,28.2 138.25,28.2 140.35,28.2 142.45,28.2 144.55,28.2 146.65,28.2 163.45,28.2 165.55,28.2 167.65,28.2 169.75,28.2 171.85,28.2 173.95,28.2 178.15,28.2 180.25,28.2 182.35,28.2 184.45,28.2 86.8,30.3 130.9,30.3 133,30.3 135.1,30.3 137.2,30.3 139.3,30.3 141.4,30.3 143.5,30.3 145.6,30.3 160.3,30.3 162.4,30.3 172.9,30.3 175,30.3 181.3,30.3 183.4,30.3 157.15,32.4 159.25,32.4 161.35,32.4 176.05,32.4 182.35,32.4 184.45,32.4 158.2,34.5 160.3,34.5 162.4,34.5 164.5,34.5 166.6,34.5 168.7,34.5 170.8,34.5 172.9,34.5 181.3,34.5 183.4,34.5 81.55,36.6 157.15,36.6 159.25,36.6 161.35,36.6 163.45,36.6 165.55,36.6 167.65,36.6 169.75,36.6 171.85,36.6 173.95,36.6 176.05,36.6 182.35,36.6 184.45,36.6 168.7,38.7 170.8,38.7 172.9,38.7 175,38.7 179.2,38.7 181.3,38.7 183.4,38.7 173.95,40.8 182.35,40.8 184.45,40.8 179.2,42.9 183.4,42.9 182.35,45 184.45,45 80.5,47.1 183.4,47.1 182.35,49.2 184.45,49.2 183.4,51.3 182.35,53.4 184.45,53.4 181.3,55.5 183.4,55.5 182.35,57.6 184.45,57.6 183.4,59.7 85.75,61.8 182.35,61.8 184.45,61.8 183.4,63.9 180.25,66 182.35,66 184.45,66 181.3,68.1 183.4,68.1 180.25,70.2 182.35,70.2 184.45,70.2 181.3,72.3 183.4,72.3 180.25,74.4 182.35,74.4 184.45,74.4 122.5,76.5 128.8,76.5 130.9,76.5 133,76.5 181.3,76.5 183.4,76.5 123.55,78.6 125.65,78.6 180.25,78.6 182.35,78.6 184.45,78.6 181.3,80.7 183.4,80.7 180.25,82.8 182.35,82.8 184.45,82.8 181.3,84.9 183.4,84.9
  other v3: 168.8,42.45 167.7,43.55 168.8,43.55 167.7,51.45 168.8,51.45 167.7,52.55 168.8,52.55 167.2,66.7 168.3,66.7 167.2,67.8 168.3,67.8 167.2,76.2 168.3,76.2 167.2,77.3 168.3,77.3
  other v4: 33.117,29.782 34.217,29.782 35.317,29.782 33.117,30.882 34.217,30.882 35.317,30.882 33.117,31.982 34.217,31.982 35.317,31.982
I2C_SCL: B15.4 R48.1 R172.1 TP33.1 U5.5 U6.5 U12.6 | length 132.9
  Top Layer w0.2: v1(27.75,21.9) R172.1@27.75,23.15 ; v1(40.7,40.6) 40.725,40.625 40.725,43.725 TP33.1@40.75,43.75 R48.1@40.75,45.55 41.1,45.55 42.05,46.5 44.9,46.5 45.6,47.2 45.6,51.5 47.8,53.7 52.226,53.7 52.883,53.7 53,53.583 B15.4@53,52.7 ; v1(69.224,57.876) 69.749,58.4 74.6,58.4 74.878,58.678 74.878,60.678 ; U6.5@73.8,60.5 74.7,60.5 74.878,60.678 ; U5.5@73.8,69.8 74.6,69.8 74.878,69.522 74.878,60.678
  Signal L4 w0.2: v1(27.75,21.9) 27.75,21.904 29.623,23.777 29.623,27.823 30.8,29 30.8,37.5 33.9,40.6 v1(40.7,40.6) 45.2,40.6 47.196,42.596 65.847,42.596 69.19,45.938 69.19,57.841 v1(69.224,57.876)
  Bottom Layer w0.2: U12.6@37.635,56.3 37.635,55.4 38.635,54.4 39.9,54.4 40.7,53.6 v1(40.7,40.6)
I2C_SDA: B15.5 R47.1 R171.1 TP32.1 U5.4 U6.4 U12.5 | length 131.4
  Top Layer w0.2: v1(25.5,21.9) R171.1@25.5,23.15 ; v1(44,41.2) TP32.1@44,43.75 R47.1@44,45.55 45.401,45.55 46.2,46.349 46.2,51.1 47.8,52.7 B15.5@52.5,52.7 ; v1(72.6,70.75) U5.4@73.8,70.75 ; U6.4@73.8,61.45 v1(73.8,66.6)
  Signal L4 w0.2: v1(25.5,21.9) 25.549,21.9 28.1,24.451 28.1,27.2 30.1,29.2 30.1,37.866 33.289,41.055 33.739,41.055 33.884,41.2 v1(44,41.2) 45.796,42.996 64.861,42.996 66.2,44.334 66.2,44.649 66.551,45 66.866,45 68.4,46.534 68.4,57.9 73.8,63.3 v1(73.8,66.6) 73.8,69.6 72.65,70.75 v1(72.6,70.75)
  Bottom Layer w0.2: U12.5@38.905,56.3 39.7,56.3 41.2,54.8 41.2,43.1 43.1,41.2 v1(44,41.2)
INTA: B1.20 R34.1 R38.1 | length 20.5
  Signal L4 w0.254: v1(54.7,18.7) 54.787,18.7 55.627,19.54 55.627,20.06 55.6,20.087 v1(55.6,23.5)
  Bottom Layer w0.2: R38.1@46.7,26.4 46.725,26.375 46.725,24.025 R34.1@46.75,24 55.1,24 v1(55.6,23.5) ; v1(54.7,18.7) 55.175,18.225 B1.20@58.3,18.225
INTB: B1.19 R35.1 R39.1 | length 26.3
  Top Layer w0.2: v1(48.4,27) 48.4,30.6 v1(49,31.2)
  Signal L4 w0.254: v1(48.4,27) 54.8,27 56.4,25.4 v1(56.4,21.1)
  Bottom Layer w0.2: R35.1@46.65,31.2 46.675,31.175 R39.1@46.675,29.627 ; R39.1@46.675,29.4 46.675,29.025 R39.1@46.7,29 ; R39.1@46.7,29.4 46.7,29.627 47.098,30.025 47.825,30.025 v1(49,31.2) ; v1(56.4,21.1) 56.4,19.6 57.125,18.875 B1.19@58.3,18.875
LCD_RESET: J4.16 R43.2 R45.2 | length 5.8
  Bottom Layer w0.2: R45.2@11.5,5.3 R43.2@13.75,5.3 13.96,5.51 J4.16@17.21,5.51
LDO_OUT: C71.1 D18.2 TP53.1 U7.2 U7.4 | length 0
  Top Layer w1: D18.2@59.61,74.85 D18.2@59.627,74.867
LINK_LED: B19.25 R165.2 | length 44.1
  Signal L4 w0.254: v1(44.5,67.7) 42.7,65.9 42.7,56.1 46,52.8 55.7,52.8 61,47.5 v1(61,44.9)
  Bottom Layer w0.2: v1(44.5,67.7) R165.2@44.5,70.05 ; v1(61,44.9) 61,43.734 63,41.734 B19.25@63,40.762
LINK_LED_K: R153.2 R165.1 | length 1.3
  Bottom Layer w0.2: R165.1@44.5,71.95 R153.2@44.5,73.3
MCP4725_A0_DAC_OFFSET_CANAL1: R59.1 R60.2 U5.6 | length 5
  Top Layer w0.2: R59.1@68.75,68.85 U5.6@73.8,68.85
MCP4725_A0_DAC_OFFSET_CANAL2: R61.1 R62.2 U6.6 | length 5
  Top Layer w0.2: R61.1@68.75,59.55 U6.6@73.8,59.55
MCP4725_VOUT_DAC_OFFSET_CANAL1: R83.1 TP50.1 U5.1 | length 18.2
  Top Layer w0.2: U5.1@76.2,68.85 76.2,68.05 TP50.1@77.5,66.75 78.25,66 82.3,66 83.7,67.4 86.35,67.4 86.85,67.9 89.5,67.9 90.25,68.65 R83.1@90.25,70.05
MCP4725_VOUT_DAC_OFFSET_CANAL2: R88.1 TP51.1 U6.1 | length 22.6
  Top Layer w0.2: U6.1@76.2,59.55 76.25,59.5 TP51.1@76.25,57.75 83.75,57.75 84.8,58.8 84.8,64.3 86,65.5 88.95,65.5 89.9,64.55 R88.1@90.25,64.55
MCU_GPIO0: J9.1 R173.2 U9.2 | length 33
  Top Layer w0.2: v1(13.9,19.79) J9.1@16.15,19.79 17.81,19.79 18.65,18.95 R173.2@19,18.95 ; v1(28.55,32.85) 28.658,32.85 28.89,33.082 U9.2@30.842,33.082
  Signal L4 w0.2: v1(13.9,19.79) 13.9,21.8 15.1,23 25.466,23 27.7,25.234 27.7,29.149 28.56,30.009 v1@28.56,32.85
MCU_GPIO1: J9.3 R174.2 U9.3 | length 42.5
  Top Layer w0.2: v1(13.9,14.71) J9.3@16.15,14.71 17.406,15.966 17.406,17.406 18,18 19.95,18 20.9,18.95 R174.2@21.25,18.95 ; v1(27.26,30.74) 27.288,30.74 29.231,32.682 U9.3@30.842,32.682
  Signal L4 w0.2: v1(13.9,14.71) 13.1,15.51 13.1,22.2 14.7,23.8 24.7,23.8 27.3,26.4 27.3,30.7 v1(27.26,30.74)
MCU_GPIO2: R168.2 TP35.1 U9.4 | length 16
  Top Layer w0.2: R168.2@18.75,25.05 18.75,26.55 19.9,27.7 TP35.1@19.9,27.8 22,29.9 27.269,29.9 29.651,32.282 U9.4@30.842,32.282
MCU_GPIO3: R169.2 TP36.1 U9.5 | length 13.5
  Top Layer w0.2: R169.2@21,25.05 21,26.5 24,29.5 27.434,29.5 29.816,31.882 U9.5@30.842,31.882
MCU_GPIO4: R170.2 TP37.1 U9.6 | length 11.1
  Top Layer w0.2: R170.2@23.25,25.05 23.25,26.45 25.9,29.1 27.6,29.1 29.982,31.482 U9.6@30.842,31.482
MCU_GPIO5: B16.8 TP39.1 U9.7 | length 54
  Top Layer w0.2: U9.7@30.842,31.082 32.149,31.082 v1(32.167,31.1) ; v1(65.1,37) TP39.1@65.1,40.3 65.1,42.3 65.821,43.021 B16.8@73.5,43.021
  Signal L4 w0.2: v1(32.167,31.1) 32.167,34.767 34.769,37.369 51.1,37.369 52.469,36 64.1,36 v1(65.1,37)
MCU_GPIO6: R18.2 U9.8 | length 116.9
  Top Layer w0.2: U9.8@30.842,30.682 31.569,30.682 32.151,30.1 v1(32.167,30.1) ; v1(121.2,14) 121.2,15.175 R18.2@121.25,15.55
  Bottom Layer w0.2: v1(32.167,30.1) 30,27.933 30,18.551 39.551,9 39.571,9 44.536,4.035 111.235,4.035 v1(121.2,14)
MCU_GPIO7: R20.2 U9.9 | length 148.2
  Top Layer w0.2: v1(29.3,29.9) 29.682,30.282 U9.9@30.842,30.282 ; v1(147,14.2) R20.2@147,15.55
  Bottom Layer w0.2: v1(29.3,29.9) 29.3,17.3 43.2,3.4 144.1,3.4 147,6.3 v1(147,14.2)
MCU_GPIO8: D13.K U9.11 | length 42.8
  Top Layer w0.152: v1(28.7,26.6) 28.728,26.628 29.328,26.628 29.764,27.064 29.764,28.886 30.351,29.473 30.833,29.473 U9.11@30.842,29.482 ; v1(50.8,22.5) 52.7,22.5 D13.K@52.75,22.55
  Signal L4 w0.152: v1(28.7,26.6) 28.7,24.3 26.1,21.7 26.1,19.9 27.976,18.024 48.624,18.024 50.8,20.2 v1(50.8,22.5)
MCU_GPIO9: B17.8 TP40.1 U9.12 | length 50.3
  Top Layer w0.2: U9.12@30.842,29.082 32.182,29.082 v1(32.2,29.1) ; v1(61.3,20.8) TP40.1@62.6,20.8 63.5,20.8 63.8,21.1 72.675,21.1 73.25,21.675 B17.8@73.5,21.675
  Signal L4 w0.2: v1(32.2,29.1) 36.634,29.1 36.934,28.8 59.9,28.8 61.3,27.4 v1(61.3,20.8)
MCU_GPIO10: D14.K U9.13 | length 32.2
  Top Layer w0.152: v1(30.6,26.8) 30.116,27.284 30.116,28.438 30.351,28.673 30.833,28.673 U9.13@30.842,28.682 ; v1(54.9,22.6) 56.7,22.6 D14.K@56.75,22.55
  Signal L4 w0.152: v1(30.6,26.8) 42.111,26.8 42.487,26.424 53.876,26.424 54.9,25.4 v1(54.9,22.6)
MCU_GPIO11: C117.2 C128.2 R94.1 R95.1 R103.1 R104.1 TP28.1 U9.14 | length 266.8
  Top Layer w0.2: U9.14@30.842,28.282 30.9,28.282 v1(30.9,27.7) ; v1(112.9,39.8) R103.1@115.5,39.8 117.125,39.8 ; v1(113.5,69.1) TP28.1@114.9,69.1 115.893,68.107 C117.2@117.85,68.107 ; R94.1@115,64.55 116.5,64.55 ; R95.1@118,64.55 116.5,64.55 ; C117.2@118,68.107 C117.2@117.85,68.107 ; R104.1@118.75,39.8 117.125,39.8 ; C128.2@118.75,43.357 118.6,43.357 117.1,41.857 117.1,39.825 117.125,39.8 ; 116.5,64.55 116.5,66.757 C117.2@117.85,68.107
  Bottom Layer w0.2: v1@30.903,27.697 36.897,27.697 37.5,28.3 37.5,35.249 36.449,36.3 26.5,36.3 22.4,40.4 9.2,40.4 3.5,46.1 3.5,82 8.2,86.7 16.351,86.7 16.501,86.85 16.999,86.85 17.149,86.7 106.7,86.7 113.5,79.9 113.5,50 114.1,49.4 114.1,46.7 112.9,45.5 v1(112.9,39.8)
MCU_GPIO12: R171.2 U9.15 | length 7.5
  Top Layer w0.2: R171.2@25.5,25.05 25.85,25.05 26.7,25.9 30.62,25.9 31.617,26.897 U9.15@31.617,27.507
MCU_GPIO13: R172.2 U9.16 | length 5.7
  Top Layer w0.2: R172.2@27.75,25.05 28.05,25.35 30.636,25.35 32.017,26.731 U9.16@32.017,27.507
MCU_GPIO14: B13.4 B14.4 TP29.1 U9.17 | length 261
  Top Layer w0.2: v1(30.8,24.5) 30.85,24.55 30.85,24.899 32.417,26.466 U9.17@32.417,27.507 ; v1(112.7,47.9) 116.5,47.9 116.9,47.5 120.7,47.5 122.2,49 B14.4@123.2,49 ; v1(112.7,72) 112.75,71.95 114.85,71.95 TP29.1@114.9,71.9 119.9,71.9 121.25,73.25 B13.4@123.2,73.25
  Bottom Layer w0.2: v1(30.8,24.5) 30.8,24.949 32.951,27.1 37.3,27.1 38,27.8 38,35.5 36.5,37 26.669,37 22.569,41.1 9.5,41.1 4.2,46.4 4.2,81.5 8.35,85.65 18.201,85.65 18.651,86.1 106.3,86.1 112.7,79.7 v1(112.7,72) 112.7,71.892 112.7,71.3 112.9,71.1 112.9,48.8 112.7,48.6 v1(112.7,47.9)
MCU_GPIO15: B13.5 TP30.1 U9.18 | length 221.8
  Top Layer w0.2: v1(32.549,25.749) 32.549,25.857 32.817,26.125 U9.18@32.817,27.507 ; v1(112.1,70.5) TP30.1@114.9,70.5 116.235,70.5 117.128,71.393 120.142,71.393 121.499,72.75 B13.5@123.2,72.75
  Bottom Layer w0.2: v1(32.549,25.749) 32.549,25.849 33.2,26.5 37.5,26.5 38.4,27.4 38.4,35.9 36.6,37.7 26.9,37.7 22.8,41.8 9.9,41.8 4.8,46.9 4.8,81.1 8.6,84.9 20,84.9 20.6,85.5 105.9,85.5 112.1,79.3 v1(112.1,70.5)
MCU_GPIO16: B14.5 TP31.1 U9.27 | length 240.9
  Top Layer w0.2: U9.27@36.417,27.507 36.417,26.991 37.508,25.9 v1(37.6,25.9) ; v1(111.5,46.7) 114.45,46.7 114.55,46.8 120.6,46.8 122.3,48.5 B14.5@123.2,48.5
  Bottom Layer w0.2: v1(37.6,25.9) 38.9,27.2 38.9,36.4 36.9,38.4 27.2,38.4 23.1,42.5 10.3,42.5 5.5,47.3 5.5,80 9.6,84.1 20.4,84.1 21.3,85 105.4,85 111.5,78.9 111.5,57 109.3,54.8 109.3,50.1 111.5,47.9 v1(111.5,46.7)
MCU_GPIO17: J4.13 TP42.1 U9.28 | length 47.7
  Top Layer w0.2: U9.28@36.817,27.507 38.372,27.507 41.5,24.379 41.5,21.75 TP42.1@43.5,19.75 43.525,19.775 44.675,19.775 v1(44.7,19.8)
  Signal L4 w0.2: J4.13@19.75,8.05 21.9,10.2 41.192,10.2 41.292,10.1 v1(41.4,10.1)
  Bottom Layer w0.2: v1(41.4,10.1) 41.4,18.9 42.3,19.8 v1(44.7,19.8)
MCU_GPIO18: B1.11 TP43.1 U9.29 | length 18.3
  Top Layer w0.2: U9.29@37.592,28.282 38.162,28.282 42.1,24.344 42.1,22.65 TP43.1@43.5,21.25 43.525,21.275 46.975,21.275 v1(47,21.3)
  Bottom Layer w0.2: v1(47,21.3) 47.1,21.3 48.875,19.525 B1.11@51.2,19.525
MCU_GPIO19: J6.5 U9.30 | length 39.5
  Top Layer w0.2: U9.30@37.592,28.682 38.328,28.682 41.31,25.7 v1(42.2,25.7) ; v1(53.3,14.7) 53.3,14.149 54.949,12.5 59.6,12.5 60.67,11.43 J6.5@60.67,8.05
  Signal L4 w0.2: v1(42.2,25.7) 51.7,25.7 52.9,24.5 52.9,16.624 53,16.524 53,16.026 52.9,15.926 52.9,15.149 53.3,14.749 v1(53.3,14.7)
MCU_GPIO20: R175.2 U9.31 | length 8.2
  Top Layer w0.2: U9.31@37.592,29.082 38.494,29.082 40.826,26.75 R175.2@44.8,26.75
MCU_GPIO21: R176.2 U9.32 | length 7.5
  Top Layer w0.2: U9.32@37.592,29.482 39.318,29.482 39.9,28.9 44.7,28.9 R176.2@44.8,29
MCU_GPIO22: J6.7 U9.34 | length 48.1
  Top Layer w0.2: U9.34@37.592,30.282 39,30.282 39.218,30.5 v1(39.7,30.5)
  Bottom Layer w0.2: v1(39.7,30.5) 39.7,25.266 37,22.566 37,12.951 39.751,10.2 40.451,10.2 46.216,4.435 56.335,4.435 56.9,5 56.9,5.8 58.1,7 58.1,8.02 J6.7@58.13,8.05
MCU_GPIO23: J6.9 U9.35 | length 55.8
  Top Layer w0.2: v1(36.5,29.8) 36.5,30.251 36.931,30.682 U9.35@37.592,30.682 ; v1(62.7,10.5) v1(62.7,14)
  Signal L4 w0.2: v1(36.5,29.8) 37.1,29.2 60.751,29.2 62,27.951 62,21.5 64.2,19.3 64.2,15.5 v1(62.7,14) ; J6.9@55.59,8.05 55.59,9.19 56.2,9.8 62,9.8 v1(62.7,10.5)